# EAGLE board PCB v67 (EAGLE 9.7.0)
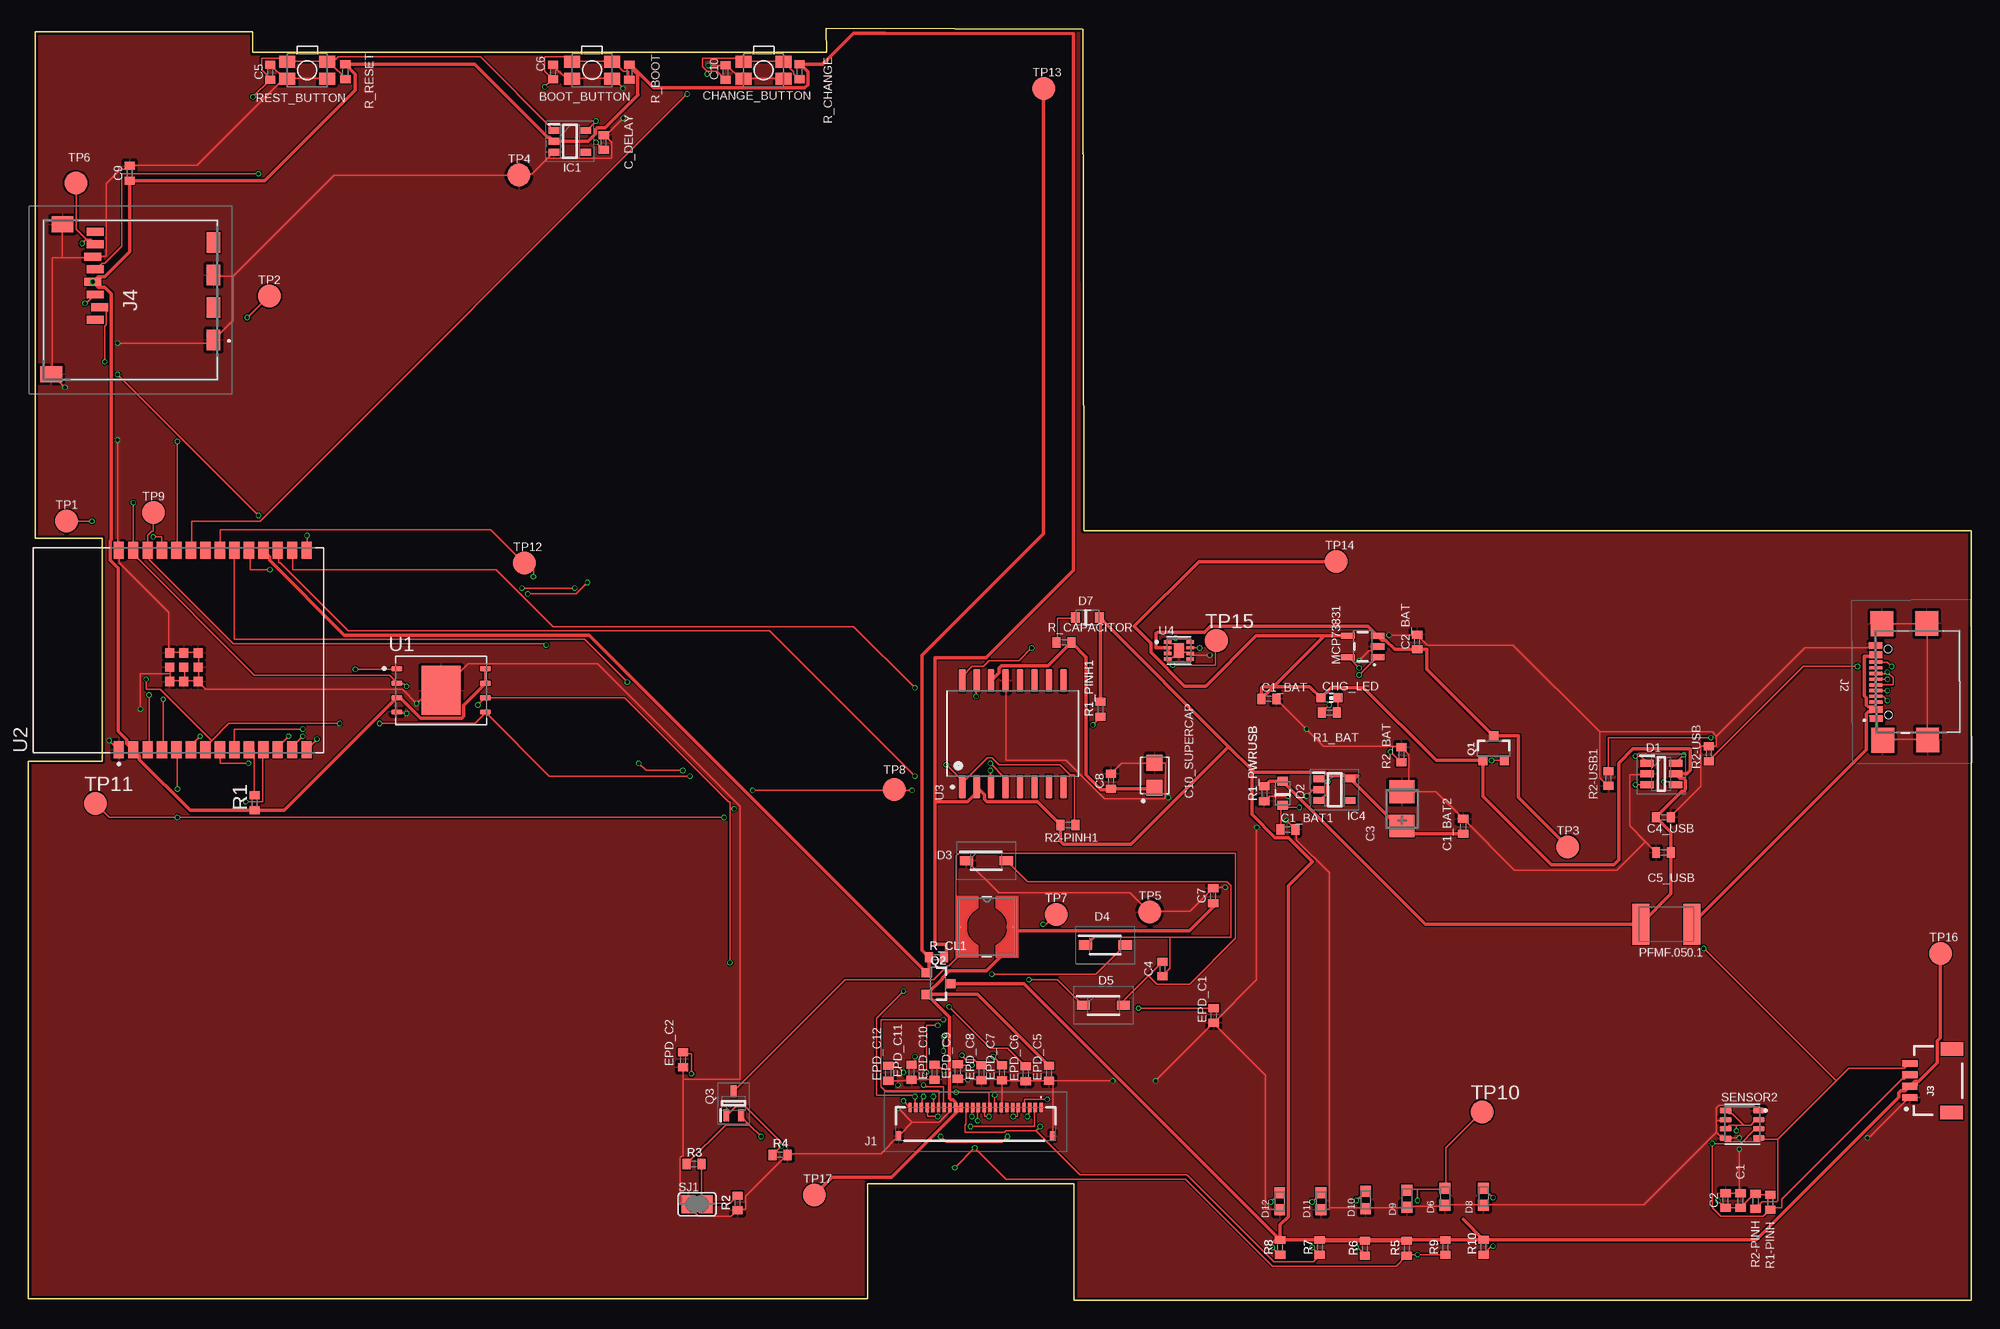
[diagram p0: board, top side]
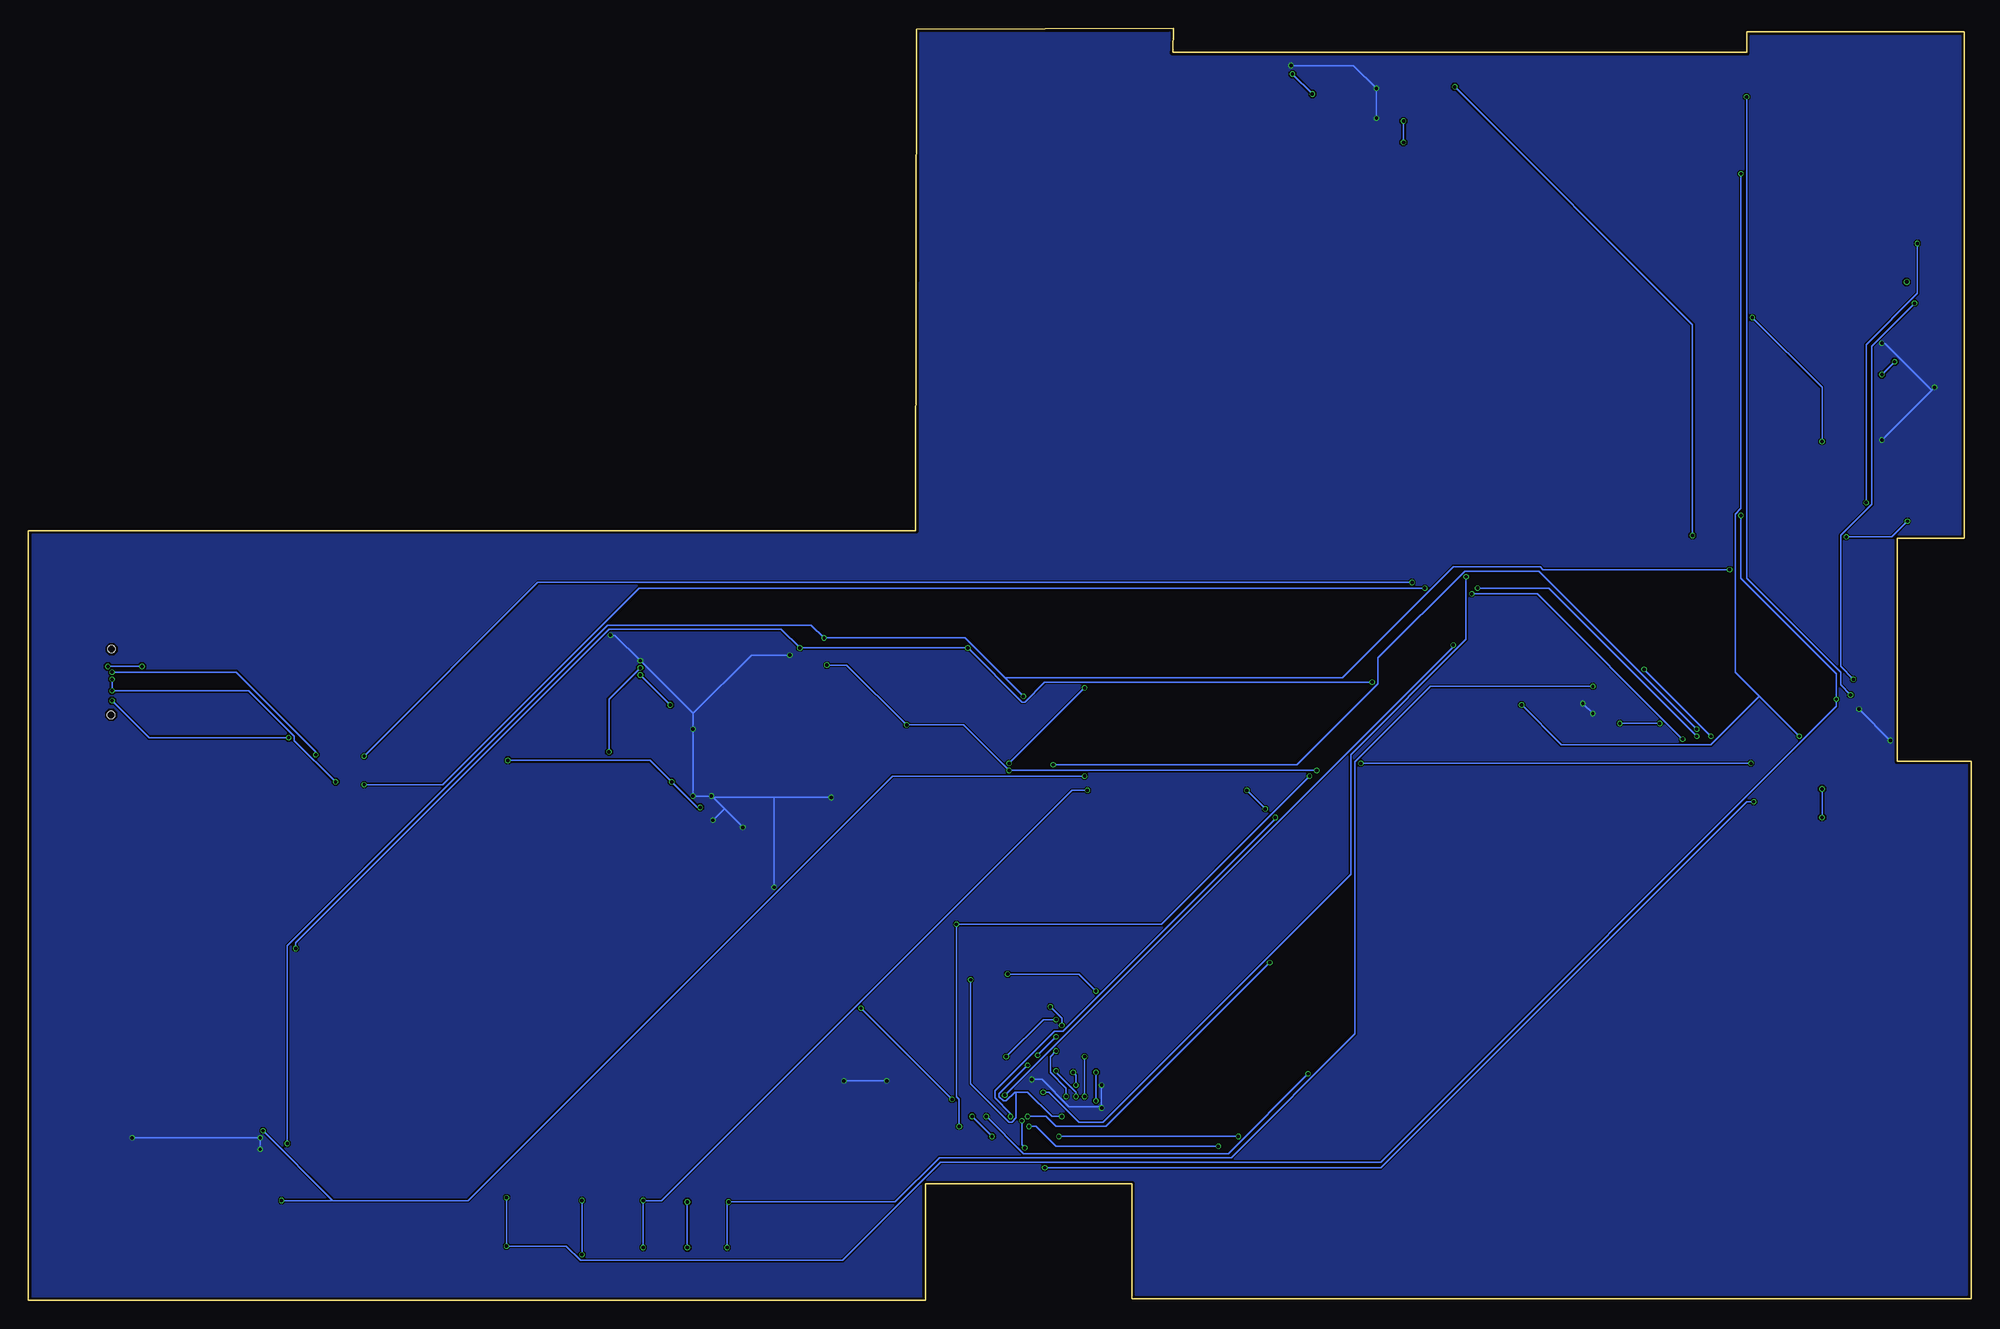
[diagram p1: board, bottom side, seen from below]

Size 170.55 x 111.65 mm. Coordinates in mm from the lower left corner, seen from the top.
Outline: 91.81,0 170.55,0 170.55,67.57 92.66,67.57 92.6,111.59 70.01,111.65 70.08,109.55 19.68,109.55 19.68,111.35 0.6,111.35 0.6,66.89 6.48,66.89 6.48,47.35 0,47.35 0,0.15 73.68,0.15 73.68,10.23 91.81,10.23 91.81,0
Copper layers (1*16): Top / Bottom
Stack-up Default Layer Stack: Top User Defined 0.035mm / Dielectric-1 User Defined 1.6mm / Bottom User Defined 0.035mm
Design rules: minimum copper width classes=1 0.3mm, minimum copper width classes=0 0.15mm, minimum copper width 5mil, minimum drill size 0.3mm, copper clearance wire_polygon to wire_polygon 5mil, copper clearance wire_polygon to pad_smd 5mil, copper clearance wire_polygon to via 5mil, copper clearance pad_smd to pad_smd 5mil, copper clearance pad_smd to via 5mil, copper clearance via to via 5mil, copper clearance smd to pad (same net) 5mil, copper clearance smd to via (same net) 5mil, copper clearance smd to smd (same net) 5mil, dimension clearance 0.2mm, via restrict clearance 0mil, restrict clearance 0mil, drill distance 6mil, keepout clearance 0mil
Net classes: 0 default: width 0.15 mm; 1 POWER: width 0.3 mm

## Footprints (pad centres in the part's own frame; a part is rotated, then mirrored left to right if it is on the bottom)
MYBUTTON = smd 1.4 x 1.05: 1 1.75,0.75; 2 -1.75,0.75; 3 -1.75,-0.75; 4 1.75,-0.75
ESP32_WROVER_EAGLE-LTSPICE_C0402 = smd 0.7 x 0.9: 1 -0.65,0; 2 0.65,0
RCL_CT3528 = smd 2 x 2.2: + -1.5,0; - 1.5,0
CAPCP3225X100N = smd 1.4 x 1.4: 1 -1.1,0; 2 1.1,0
ADAFRUIT_CHIP-LED0603 = smd 0.8 x 0.8: A 0,-0.75; C 0,0.75
SOT95P280X145-6N = smd 1.2 x 0.6: 1 -1.25,0.95; 2 -1.25,0; 3 -1.25,-0.95; 4 1.25,-0.95; 5 1.25,0; 6 1.25,0.95
ESP32_WROVER_AVX---SD0805S020S1R0_AVX_SD0805S020S1R0_0 = smd 0.8 x 0.9: 1 -1.05,0; 2 1.05,0
SOD3716X135N = smd 1.15 x 0.8: 1 -1.75,0; 2 1.75,0
DIOC1608X36N = smd 0.97 x 0.94: 1 -0.75,0; 2 0.75,0
SOT95P280X125-5N = smd 0.9 x 0.6: 1 -1.4,0.95; 2 -1.4,0; 3 -1.4,-0.95; 4 1.4,-0.95; 5 1.4,0.95
SOT95P280X120-5N = smd 0.9 x 0.6: 1 -1.4,0.95; 2 -1.4,0; 3 -1.4,-0.95; 4 1.4,-0.95; 5 1.4,0.95
FH34SRJ24S05SH99 = smd 0.3 x 0.8: 1 5.75,1.45; 2 5.25,1.45; 3 4.75,1.45; 4 4.25,1.45; 5 3.75,1.45; 6 3.25,1.45; 7 2.75,1.45; 8 2.25,1.45; 9 1.75,1.45; 10 1.25,1.45; 11 0.75,1.45; 12 0.25,1.45; 13 -0.25,1.45; 14 -0.75,1.45; 15 -1.25,1.45; 16 -1.75,1.45; 17 -2.25,1.45; 18 -2.75,1.45; 19 -3.25,1.45; 20 -3.75,1.45; 21 -4.25,1.45; 22 -4.75,1.45; 23 -5.25,1.45; 24 -5.75,1.45 | smd 0.4 x 0.8: MP1 6.75,-1.05; MP2 -6.75,-1.05
SAMACSYS_PARTS_USB4110GFA = smd 0.3 x 1.15: A1 -3.35,3.678; A4 -2.55,3.678; A5 -1.25,3.678; A6 -0.25,3.678; A7 0.25,3.678; A8 1.25,3.678; A9 2.55,3.678; A12 3.35,3.678; B1 3.05,3.678; B4 2.25,3.678; B5 1.75,3.678; B6 0.75,3.678; B7 -0.75,3.678; B8 -1.75,3.678; B9 -2.25,3.678; B12 -3.05,3.678 | smd 2.18 x 2: MP1 -5.11,-0.827; MP2 5.11,-0.827; MP3 -5.11,3.103; MP4 5.11,3.103 | hole 0.65: -2.89,2.603; 2.89,2.603
JST04_1MM_RA = smd 0.6 x 1.35: 1 -1.5,0; 2 -0.5,0; 3 0.5,0; 4 1.5,0 | smd 1.2 x 2: NC1 2.8,-3.675; NC2 -2.8,-3.675
112ATAARR03ATTEND = smd 1.8 x 1.2: G1 10.6,10.4; G2 4.9,10.4; S1 7.75,10.4; S2 2.05,10.4 | smd 1.4 x 1.9: G3 13.6,-3.85; G4 0.45,-2.85 | smd 0.7 x 1.5: P1 8.8,0; P2 7.7,0.4; P3 6.6,0; P4 5.5,-0.2; P5 4.4,0; P6 3.3,-0.2; P7 2.2,0; P8 1.1,0
IND_4828-WE-TPC_WRE = smd 0.127 x 0.127: 1 -2.286,0; 2 2.286,0
ESP32_WROVER_SPARKFUN-IC-POWER_SOT23-5 = smd 0.55 x 1.2: 1 -0.95,-1.3; 2 0,-1.3; 3 0.95,-1.3; 4 0.95,1.3; 5 -0.95,1.3
ESP32C6_VARISTOR_CT/CN1812 = smd 1.5 x 3.6: 1 -2.25,0; 2 2.25,0
ESP32_WROVER_SPARKFUN-DISCRETESEMI_SOT23-3 = smd 0.8 x 0.9: 1 -0.95,-1; 2 0.95,-1; 3 0,1.1
SOT65P210X110-3N = smd 1.05 x 0.5: 1 -1.05,0.65; 2 -1.05,-0.65; 3 1.05,0
ESP32_WROVER_EAGLE-LTSPICE_R0402 = smd 0.7 x 0.9: 1 -0.65,0; 2 0.65,0
ESP32_WROVER_BME680_PSON80P300X300X100-8N = smd 1.016 x 0.5: 1 1.458,1.2; 2 1.458,0.4; 3 1.458,-0.4; 4 1.458,-1.2; 5 -1.458,-1.22; 6 -1.458,-0.4; 7 -1.458,0.4; 8 -1.458,1.2
SJ = smd 1.168 x 1.6: 1 -0.762,0; 2 0.762,0
TP20R = smd 2 x 2: TP 0,0
SON127P600X800X80-9N = smd 0.94 x 0.44: 1 -3.895,1.905; 2 -3.895,0.635; 3 -3.895,-0.635; 4 -3.895,-1.905; 5 3.895,-1.905; 6 3.895,-0.635; 7 3.895,0.635; 8 3.895,1.905 | smd 3.4 x 4.3: 9 0,0
XCVR_ESP32-C6-WROOM-1-N8 = smd 1.5 x 0.9: 1 -8.75,5.26; 2 -8.75,3.99; 3 -8.75,2.72; 4 -8.75,1.45; 5 -8.75,0.18; 6 -8.75,-1.09; 7 -8.75,-2.36; 8 -8.75,-3.63; 9 -8.75,-4.9; 10 -8.75,-6.17; 11 -8.75,-7.44; 12 -8.75,-8.71; 13 -8.75,-9.98; 14 -8.75,-11.25; 15 8.75,-11.25; 16 8.75,-9.98; 17 8.75,-8.71; 18 8.75,-7.44; 19 8.75,-6.17; 20 8.75,-4.9; 21 8.75,-3.63; 22 8.75,-2.36; 23 8.75,-1.09; 24 8.75,0.18; 25 8.75,1.45; 26 8.75,2.72; 27 8.75,3.99; 28 8.75,5.26 | smd 0.8 x 0.8: 29_1 -2.755,0.79; 29_2 -1.505,0.79; 29_3 -0.255,0.79; 29_4 -2.755,-0.46; 29_5 -1.505,-0.46; 29_6 -0.255,-0.46; 29_7 -2.755,-1.71; 29_8 -1.505,-1.71; 29_9 -0.255,-1.71
SOIC127P1032X265-16N = smd 2.05 x 0.59: 1 -4.655,4.445; 2 -4.655,3.175; 3 -4.655,1.905; 4 -4.655,0.635; 5 -4.655,-0.635; 6 -4.655,-1.905; 7 -4.655,-3.175; 8 -4.655,-4.445; 9 4.655,-4.445; 10 4.655,-3.175; 11 4.655,-1.905; 12 4.655,-0.635; 13 4.655,0.635; 14 4.655,1.905; 15 4.655,3.175; 16 4.655,4.445
SON50P200X200X80-9N = smd 0.76 x 0.27: 1 -0.985,0.75; 2 -0.985,0.25; 3 -0.985,-0.25; 4 -0.985,-0.75; 5 0.985,-0.75; 6 0.985,-0.25; 7 0.985,0.25; 8 0.985,0.75 | smd 0.9 x 1.3: 9 0,0

## Placement (x,y rotation side)
BOOT_BUTTON  BUTTON_CUSYOMV1  [MYBUTTON]  49.48,108 180 top
C1  100nF  [ESP32_WROVER_EAGLE-LTSPICE_C0402]  150.31,8.78 90 top
C1_BAT  4.7uF  [ESP32_WROVER_EAGLE-LTSPICE_C0402]  108.9,52.8 0 top
C1_BAT1  4.7uF  [ESP32_WROVER_EAGLE-LTSPICE_C0402]  110.57,41.34 0 top
C1_BAT2  4.7uF  [ESP32_WROVER_EAGLE-LTSPICE_C0402]  125.96,41.62 90 top
C2  100nF  [ESP32_WROVER_EAGLE-LTSPICE_C0402]  148.99,8.78 90 top
C2_BAT  4.7uF  [ESP32_WROVER_EAGLE-LTSPICE_C0402]  121.91,57.8 90 top
C3  100uF TANT  [RCL_CT3528]  120.59,43.15 90 top
C4  4.7uF/25V  [ESP32_WROVER_EAGLE-LTSPICE_C0402]  99.55,29.09 90 top
C4_USB  100nF  [ESP32_WROVER_EAGLE-LTSPICE_C0402]  143.54,42.42 0 top
C5  1uF  [ESP32_WROVER_EAGLE-LTSPICE_C0402]  21.23,107.81 90 top
C5_USB  4.7uF  [ESP32_WROVER_EAGLE-LTSPICE_C0402]  143.55,39.32 180 top
C6  100nF  [ESP32_WROVER_EAGLE-LTSPICE_C0402]  46.07,107.83 90 top
C7  10uF  [ESP32_WROVER_EAGLE-LTSPICE_C0402]  104.01,35.52 90 top
C8  100nF  [ESP32_WROVER_EAGLE-LTSPICE_C0402]  95.05,45.58 90 top
C9  100nF  [ESP32_WROVER_EAGLE-LTSPICE_C0402]  8.89,98.94 90 top
C10  100nF  [ESP32_WROVER_EAGLE-LTSPICE_C0402]  61.21,107.78 90 top
C10_SUPERCAP  CPH3225A  [CAPCP3225X100N]  98.87,46.09 90 top
C_DELAY  100nF  [ESP32_WROVER_EAGLE-LTSPICE_C0402]  50.51,101.64 90 top
CHANGE_BUTTON  BUTTON_CUSYOMV1  [MYBUTTON]  64.54,107.98 180 top
CHG_LED  [ADAFRUIT_CHIP-LED0603]  114.22,52.9 270 top
D1  USBLC6-2SC6Y  [SOT95P280X145-6N]  143.36,46.22 0 top
D2  ESP32_WROVER_AVX---SD0805S020S1R0_AVX_SD0805S020S1R0_0_0AVX_SD0805S020S1R0_0_0  [ESP32_WROVER_AVX---SD0805S020S1R0_AVX_SD0805S020S1R0_0]  110.11,44.53 90 top
D3  MBR0530  [SOD3716X135N]  84.1,38.6 0 top
D4  MBR0530  [SOD3716X135N]  94.54,31.2 0 top
D5  MBR0530  [SOD3716X135N]  94.38,25.9 0 top
D6  PGB1010603MR  [DIOC1608X36N]  124.36,9.12 90 top
D7  ESP32_WROVER_AVX---SD0805S020S1R0_AVX_SD0805S020S1R0_0_0AVX_SD0805S020S1R0_0_0  [ESP32_WROVER_AVX---SD0805S020S1R0_AVX_SD0805S020S1R0_0]  92.98,59.95 0 top
D8  PGB1010603MR  [DIOC1608X36N]  127.74,9.12 90 top
D9  PGB1010603MR  [DIOC1608X36N]  121.02,8.92 90 top
D10  PGB1010603MR  [DIOC1608X36N]  117.4,8.82 90 top
D11  PGB1010603MR  [DIOC1608X36N]  113.48,8.72 90 top
D12  PGB1010603MR  [DIOC1608X36N]  109.86,8.72 90 top
EPD_C1  1uF/50v  [ESP32_WROVER_EAGLE-LTSPICE_C0402]  104.06,25.02 90 top
EPD_C2  1uF/50V  [ESP32_WROVER_EAGLE-LTSPICE_C0402]  57.47,21.12 90 top
EPD_C5  0.1uF/50V  [ESP32_WROVER_EAGLE-LTSPICE_C0402]  89.59,19.94 90 top
EPD_C6  1uF/50V  [ESP32_WROVER_EAGLE-LTSPICE_C0402]  87.56,19.9 90 top
EPD_C7  1uF/50V  [ESP32_WROVER_EAGLE-LTSPICE_C0402]  85.47,20 90 top
EPD_C8  1uF/50V  [ESP32_WROVER_EAGLE-LTSPICE_C0402]  83.68,20 90 top
EPD_C9  1uF/50V  [ESP32_WROVER_EAGLE-LTSPICE_C0402]  81.59,20.1 90 top
EPD_C10  1uF/50V  [ESP32_WROVER_EAGLE-LTSPICE_C0402]  79.55,20.04 90 top
EPD_C11  1uF/50V  [ESP32_WROVER_EAGLE-LTSPICE_C0402]  77.53,20.04 90 top
EPD_C12  1uF/50V  [ESP32_WROVER_EAGLE-LTSPICE_C0402]  75.49,19.94 90 top
IC1  BD5229G-TR  [SOT95P280X125-5N]  47.53,101.74 0 top
IC4  XC6220A331MR-G  [SOT95P280X120-5N]  114.67,44.84 0 top
J1  FH34SRJ-24S-0.5SH_99_  [FH34SRJ24S05SH99]  83.15,15.49 0 top
J2  SAMACSYS_PARTS_USB4110-GF-A  [SAMACSYS_PARTS_USB4110GFA]  165.87,54.31 90.4 top
J3  QWIIC_RIGHT_ANGLE  [JST04_1MM_RA]  165.18,19.31 89.6 top
J4  112A-TAAR-R03_ATTEND  [112ATAARR03ATTEND]  5.85,94.9 270 top
L1  68uH  [IND_4828-WE-TPC_WRE]  84.15,32.8 0 top
MCP73831  ESP32_WROVER_SPARKFUN-IC-POWER_MCP73831  [ESP32_WROVER_SPARKFUN-IC-POWER_SOT23-5]  117.14,57.4 90 top
PFMF.050.1  ESP32C6_VARISTORCN1812  [ESP32C6_VARISTOR_CT/CN1812]  143.8,33.03 180 top
Q1  20V/4.2A/52mΩ/1.4W  [ESP32_WROVER_SPARKFUN-DISCRETESEMI_SOT23-3]  128.64,48.41 0 top
Q2  20V/4.2A/52mΩ/1.4W  [ESP32_WROVER_SPARKFUN-DISCRETESEMI_SOT23-3]  79.86,27.81 270 top
Q3  SI1308EDL-T1-GE3  [SOT65P210X110-3N]  61.91,17.3 90 top
R1  10K  [ESP32_WROVER_EAGLE-LTSPICE_R0402]  19.85,43.68 90 top
R1-PINH  10K  [ESP32_WROVER_EAGLE-LTSPICE_R0402]  152.92,8.62 90 top
R1_BAT  200  [ESP32_WROVER_EAGLE-LTSPICE_R0402]  114.22,51.6 0 top
R1_PINH1  1OK  [ESP32_WROVER_EAGLE-LTSPICE_R0402]  94.11,51.89 90 top
R1_PWRUSB  100K  [ESP32_WROVER_EAGLE-LTSPICE_R0402]  108.5,44.49 90 top
R2  2.2  [ESP32_WROVER_EAGLE-LTSPICE_R0402]  62.25,8.56 90 top
R2-PINH  10K  [ESP32_WROVER_EAGLE-LTSPICE_R0402]  151.63,8.72 90 top
R2-PINH1  10K  [ESP32_WROVER_EAGLE-LTSPICE_R0402]  91.27,41.74 180 top
R2-USB  5k1  [ESP32_WROVER_EAGLE-LTSPICE_R0402]  147.54,48 90 top
R2-USB1  5k1  [ESP32_WROVER_EAGLE-LTSPICE_R0402]  138.7,45.82 90 top
R2_BAT  2K  [ESP32_WROVER_EAGLE-LTSPICE_R0402]  120.53,47.9 90 top
R3  0.47  [ESP32_WROVER_EAGLE-LTSPICE_R0402]  58.43,11.98 0 top
R4  10K  [ESP32_WROVER_EAGLE-LTSPICE_R0402]  65.99,12.78 0 top
R5  10K  [ESP32_WROVER_EAGLE-LTSPICE_R0402]  121.01,4.58 90 top
R6  10K  [ESP32_WROVER_EAGLE-LTSPICE_R0402]  117.33,4.58 90 top
R7  10K  [ESP32_WROVER_EAGLE-LTSPICE_R0402]  113.37,4.66 90 top
R8  10K  [ESP32_WROVER_EAGLE-LTSPICE_R0402]  109.89,4.66 90 top
R9  10K  [ESP32_WROVER_EAGLE-LTSPICE_R0402]  124.41,4.66 90 top
R10  10K  [ESP32_WROVER_EAGLE-LTSPICE_R0402]  127.75,4.68 90 top
R_BOOT  1OK  [ESP32_WROVER_EAGLE-LTSPICE_R0402]  52.76,107.82 90 top
R_CAPACITOR  15  [ESP32_WROVER_EAGLE-LTSPICE_R0402]  90.92,57.76 0 top
R_CHANGE  10K  [ESP32_WROVER_EAGLE-LTSPICE_R0402]  67.7,107.84 90 top
R_CL1  10K  [ESP32_WROVER_EAGLE-LTSPICE_R0402]  79.73,30.12 0 top
R_RESET  10K  [ESP32_WROVER_EAGLE-LTSPICE_R0402]  27.83,107.84 90 top
REST_BUTTON  BUTTON_CUSYOMV1  [MYBUTTON]  24.48,107.98 180 top
SENSOR2  BME680  [ESP32_WROVER_BME680_PSON80P300X300X100-8N]  150.46,15.47 0 top
SJ1  [SJ]  58.7,8.44 0 top
TP1  TPTP20R  [TP20R]  3.35,68.42 0 top
TP2  TPTP20R  [TP20R]  21.15,88.16 0 top
TP3  TPTP20R  [TP20R]  135.15,39.82 0 top
TP4  TPTP20R  [TP20R]  43.07,98.78 0 top
TP5  TPTP20R  [TP20R]  98.45,34.1 0 top
TP6  TPTP20R  [TP20R]  4.15,98.1 0 top
TP7  TPTP20R  [TP20R]  90.23,33.9 0 top
TP8  TPTP20R  [TP20R]  76.03,44.86 0 top
TP9  TPTP20R  [TP20R]  10.97,69.16 0 top
TP10  TPTP20R  [TP20R]  127.62,16.56 0 top
TP11  TPTP20R  [TP20R]  5.89,43.64 0 top
TP12  TPTP20R  [TP20R]  43.53,64.72 0 top
TP13  TPTP20R  [TP20R]  89.12,106.38 0 top
TP14  TPTP20R  [TP20R]  114.82,64.86 0 top
TP15  TPTP20R  [TP20R]  104.3,57.92 0 top
TP16  TPTP20R  [TP20R]  167.87,30.46 0 top
TP17  TPTP20R  [TP20R]  69,9.26 0 top
U1  W25Q512JVEIQ  [SON127P600X800X80-9N]  36.23,53.55 0 top
U2  ESP32-C6-WROOM-1-N8  [XCVR_ESP32-C6-WROOM-1-N8]  13.18,57.09 90 top
U3  DS3231SN#  [SOIC127P1032X265-16N]  86.43,49.75 90 top
U4  MAX17048G+T10  [SON50P200X200X80-9N]  101.01,57.05 0 top

## Library data of the parts
BOOT_BUTTON CHANGE_BUTTON CHG_LED PFMF.050.1 REST_BUTTON SJ1 TP1-TP17 = DeskAssistant v19 v1
C1 C1_BAT C1_BAT1 C1_BAT2 C2 C2_BAT C4 C4_USB C5 C5_USB C6-C10 C_DELAY EPD_C1 EPD_C2 EPD_C5-EPD_C12 = DeskAssistant v19 v1; SPICEMODEL: NONE; SPICEPREFIX: C
C3 = DeskAssistant v19 v1; SPICEPREFIX: C
C10_SUPERCAP = DeskAssistant v19 v1; AVAILABILITY: Not in stock; CHECK_PRICES: https://www.snapeda.com/parts/CPH3225A/Seiko+Instruments/view-part/?ref=eda; DESCRIPTION: 11 mF (EDLC) Supercapacitor 3.3 V 1210 (3225 Metric) - -; MF: Seiko Instruments; MP: CPH3225A; PACKAGE: 1210 Seiko; PRICE: None; PURCHASE-URL: https://www.snapeda.com/api/url_track_click_mouser/?unipart_id=562593&manufacturer=Seiko Instruments&part_name=CPH3225A&search_term=None; SNAPEDA_LINK: https://www.snapeda.com/parts/CPH3225A/Seiko+Instruments/view-part/?ref=snap
D1 = DeskAssistant v19 v1; AVAILABILITY: In Stock; CHECK_PRICES: https://www.snapeda.com/parts/USBLC6-2SC6Y/STMicroelectronics/view-part/?ref=eda; DESCRIPTION: 17V Clamp 5A (8/20µs) Ipp Tvs Diode Surface Mount SOT-23-6; MF: STMicroelectronics; MP: USBLC6-2SC6Y; PACKAGE: SOT-23-6 STMicroelectronics; PRICE: None; SNAPEDA_LINK: https://www.snapeda.com/parts/USBLC6-2SC6Y/STMicroelectronics/view-part/?ref=snap
D2 D7 = DeskAssistant v19 v1; CENTROID_NOT_SPECIFIED: No; DATASHEET: http://datasheets.avx.com/schottky.pdf; DIGIKEY_DESCRIPTION: DIODE SCHOTTKY 20V 1A 0805; DIGIKEY_PART_NUMBER: 478-7800-1-ND; LEAD_FREE: yes; MF: AVX; MOUSER_PART_NUMBER: 581-SD0805S020S1R0; PACKAGE: 0805 (2012 metric); PREFIX: D; ROHS: yes; TEMPERATURE_RANGE_HIGH: +125°C; TEMPERATURE_RANGE_LOW: -55°C
D3-D5 = DeskAssistant v19 v1; AVAILABILITY: In Stock; CHECK_PRICES: https://www.snapeda.com/parts/MBR0530/Onsemi/view-part/?ref=eda; DESCRIPTION: Diode Schottky 30 V 500mA Surface Mount SOD-123; MF: ON Semiconductor; MP: MBR0530; PACKAGE: SOD-123-2 ON Semiconductor; PRICE: None; PURCHASE-URL: https://www.snapeda.com/api/url_track_click_mouser/?unipart_id=179458&manufacturer=ON Semiconductor&part_name=MBR0530&search_term=None; SNAPEDA_LINK: https://www.snapeda.com/parts/MBR0530/Onsemi/view-part/?ref=snap
D6 D8-D12 = DeskAssistant v19 v1; AVAILABILITY: In Stock; CHECK_PRICES: https://www.snapeda.com/parts/PGB1010603MR/Littelfuse/view-part/?ref=eda; DESCRIPTION: 150V (Typ) Clamp - Ipp Tvs Diode Surface Mount 0603 (1608 Metric); MF: Littelfuse Inc.; MP: PGB1010603MR; PACKAGE: 0603 Littelfuse Inc.; PRICE: None; PURCHASE-URL: https://www.snapeda.com/api/url_track_click_mouser/?unipart_id=5659453&manufacturer=Littelfuse Inc.&part_name=PGB1010603MR&search_term=None; SNAPEDA_LINK: https://www.snapeda.com/parts/PGB1010603MR/Littelfuse/view-part/?ref=snap
IC1 = DeskAssistant v19 v1; DESCRIPTION: Voltage Detector with Adjustable Delay Time: CMOS processes are utilized to develop high precision, low current consumption CMOS reset ICs that allow arbitrary setting of the delay time. The extensive lineup includes both Nch Open Drain and CMOS output types in a wide range of detection voltages (from 2.3V to 6.0V, in 0.1V steps), enabling selection of the ideal solution based on customer requirements. In addition, the entire series is of course both lead-free and RoHS-compliant.; HEIGHT: 1.25mm; MANUFACTURER_NAME: ROHM Semiconductor; MANUFACTURER_PART_NUMBER: BD5229G-TR; MOUSER_PART_NUMBER: 755-BD5229G-TR; MOUSER_PRICE-STOCK: https://www.mouser.co.uk/ProductDetail/ROHM-Semiconductor/BD5229G-TR?qs=4kLU8WoGk0vvnhrrYwdszw%3D%3D
IC4 = DeskAssistant v19 v1; DESCRIPTION: LDO Voltage Regulators; HEIGHT: 1.2mm; MANUFACTURER_NAME: Torex; MANUFACTURER_PART_NUMBER: XC6220A331MR-G; MOUSER_PART_NUMBER: 865-XC6220A331MR-G; MOUSER_PRICE-STOCK: https://www.mouser.co.uk/ProductDetail/Torex-Semiconductor/XC6220A331MR-G?qs=AsjdqWjXhJ8ZSWznL1J0gg%3D%3D
J1 = DeskAssistant v19 v1; DESCRIPTION: 24 Position FFC, FPC Connector Contacts, Top and Bottom 0.020" (0.50mm) Surface Mount, Right Angle; HEIGHT: 1.1mm; MANUFACTURER_NAME: Hirose; MANUFACTURER_PART_NUMBER: FH34SRJ-24S-0.5SH(99); MOUSER_PART_NUMBER: 798-FH34SRJ24S05SH99; MOUSER_PRICE-STOCK: https://www.mouser.co.uk/ProductDetail/Hirose-Connector/FH34SRJ-24S-0.5SH99?qs=vcbW%252B4%252BSTIpKBl5ap9J8Fw%3D%3D
J2 = DeskAssistant v19 v1; DESCRIPTION: CONN USB 2.0 TYPE-C R/A SMT; HEIGHT: 3.26mm; MANUFACTURER_NAME: GCT (GLOBAL CONNECTOR TECHNOLOGY); MANUFACTURER_PART_NUMBER: USB4110-GF-A; MOUSER_PART_NUMBER: 640-USB4110-GF-A; MOUSER_PRICE-STOCK: https://www.mouser.co.uk/ProductDetail/GCT/USB4110-GF-A?qs=KUoIvG%2F9IlYiZvIXQjyJeA%3D%3D
J3 = DeskAssistant v19 v1; PROD_ID: CONN-13694
J4 = DeskAssistant v19 v1; DESCRIPTION: Micro SD Card Socket, Push-Push Type, Top Mount, SMT, H=1.83mm, 10u; HEIGHT: 1.9mm; MANUFACTURER_NAME: ATTEND; MANUFACTURER_PART_NUMBER: 112A-TAAR-R03 ATTEND
L1 = DeskAssistant v19 v1; COPYRIGHT: Copyright (C) 2024 Ultra Librarian. All rights reserved.; MANUFACTURER_PART_NUMBER: 744043680; MFR_NAME: Wurth Electronics
MCP73831 = DeskAssistant v19 v1; PROD_ID: IC-09995
Q1 Q2 = DeskAssistant v19 v1; PROD_ID: TRAN-14388
Q3 = DeskAssistant v19 v1; AVAILABILITY: In Stock; CHECK_PRICES: https://www.snapeda.com/parts/SI1308EDL-T1-GE3/Vishay+Siliconix/view-part/?ref=eda; DESCRIPTION: Si1308EDL-T1-GE3 N-channel MOSFET Transistor, 1.5 A, 30 V, 3-Pin SC-70 | Siliconix / Vishay SI1308EDL-T1-GE3; MF: Vishay Siliconix; MP: SI1308EDL-T1-GE3; PACKAGE: SOT-323 Vishay Semiconductor; PRICE: None; PURCHASE-URL: https://www.snapeda.com/api/url_track_click_mouser/?unipart_id=274603&manufacturer=Vishay Siliconix&part_name=SI1308EDL-T1-GE3&search_term=None; SNAPEDA_LINK: https://www.snapeda.com/parts/SI1308EDL-T1-GE3/Vishay+Siliconix/view-part/?ref=snap
R1 R1-PINH R1_BAT R1_PINH1 R1_PWRUSB R2 R2-PINH R2-PINH1 R2-USB R2-USB1 R2_BAT R3-R10 R_BOOT R_CAPACITOR R_CHANGE R_CL1 R_RESET = DeskAssistant v19 v1; SPICEMODEL: NONE; SPICEPREFIX: R
SENSOR2 = DeskAssistant v19 v1; AVAILABILITY: Unavailable; DESCRIPTION: Integrated Environmental Unit; MF: Bosch Sensortec; MP: BME680; PACKAGE: LGA-8 Bosch Tools; PRICE: None
U1 = DeskAssistant v19 v1; AVAILABILITY: In Stock; CHECK_PRICES: https://www.snapeda.com/parts/W25Q512JVEIQ/Winbond+Electronics/view-part/?ref=eda; DESCRIPTION: FLASH - NOR Memory IC 512Mb (64M x 8) SPI - Quad I/O 133 MHz 8-WSON (8x6); MF: Winbond Electronics; MP: W25Q512JVEIQ; PACKAGE: Package; PRICE: None; SNAPEDA_LINK: https://www.snapeda.com/parts/W25Q512JVEIQ/Winbond+Electronics/view-part/?ref=snap
U2 = DeskAssistant v19 v1; AVAILABILITY: In Stock; CHECK_PRICES: https://www.snapeda.com/parts/ESP32-C6-WROOM-1-N8/Espressif+Systems/view-part/?ref=eda; DESCRIPTION: Multiprotocol Modules ESP32-C6 module, Wi-Fi 6 in 2.4 GHz band, Bluetooth 5, Zigbee 3.0 and Thread. ESP34-WROOM Compatible - ENGINEERING SAMPLE; MF: Espressif Systems; MP: ESP32-C6-WROOM-1-N8; PACKAGE: None; PRICE: None; SNAPEDA_LINK: https://www.snapeda.com/parts/ESP32-C6-WROOM-1-N8/Espressif+Systems/view-part/?ref=snap
U3 = DeskAssistant v19 v1; AVAILABILITY: In Stock; CHECK_PRICES: https://www.snapeda.com/parts/DS3231SN%23/Analog+Devices/view-part/?ref=eda; DESCRIPTION: Extremely Accurate I²C-Integrated RTC/TCXO/Crystal; MF: Analog Devices; MP: DS3231SN#; PACKAGE: SOIC-16 Maxim; PRICE: None; PURCHASE-URL: https://www.snapeda.com/api/url_track_click_mouser/?unipart_id=99048&manufacturer=Analog Devices&part_name=DS3231SN#&search_term=None; SNAPEDA_LINK: https://www.snapeda.com/parts/DS3231SN%23/Analog+Devices/view-part/?ref=snap
U4 = DeskAssistant v19 v1; AVAILABILITY: In Stock; CHECK_PRICES: https://www.snapeda.com/parts/MAX17048G+T10/Analog+Devices/view-part/?ref=eda; DESCRIPTION: 3µA 1-Cell/2-Cell Fuel Gauge with ModelGauge; MF: Analog Devices; MP: MAX17048G+T10; PACKAGE: TDFN-8 Maxim; PRICE: None; PURCHASE-URL: https://www.snapeda.com/api/url_track_click_mouser/?unipart_id=329239&manufacturer=Analog Devices&part_name=MAX17048G+T10&search_term=None; SNAPEDA_LINK: https://www.snapeda.com/parts/MAX17048G+T10/Analog+Devices/view-part/?ref=snap

## Nets
3V3 [POWER]: C1_BAT2.1 C3.+ C9.1 D7.2 IC1.2 IC4.5 J3.2 J4.P4 Q2.3 R1.1 R1_PINH1.2 R2-PINH1.2 R5.2 R6.2 R7.2 R8.2 R9.2 R10.2 R_BOOT.2 R_CHANGE.2 R_CL1.2 R_RESET.2 TP16.TP U1.3 U1.7 U1.8 U2.2 U3.2
32KHZ: R2-PINH1.1 U2.9 U3.1
DN: D1.4 J2.A7 J2.B7
DP: D1.6 J2.A6 J2.B6
EPD_3V3 [POWER]: C7.1 EPD_C5.2 J1.15 J1.16 L1.2 Q2.2 TP17.TP
EPD_3V3_C [POWER]: Q2.1 R_CL1.1 TP13.TP U2.18
EPD_BUSY: J1.9 TP9.TP U2.26
EPD_CS: D6.2 D9.2 J1.12 R5.1 R9.1 TP10.TP U2.11
EPD_DC: J1.11 TP11.TP U2.5
EPD_RST: J1.10 TP12.TP U2.21
FLASH_CS: U1.1 U2.12
GDR: J1.2 Q3.1 R4.1
GND: BOOT_BUTTON.1 BOOT_BUTTON.2 C1.2 C1_BAT1.2 C1_BAT2.2 C1_BAT.2 C2.2 C2_BAT.2 C3.- C4_USB.2 C5.2 C5_USB.2 C6.2 C7.2 C8.2 C9.2 C10.2 C10_SUPERCAP.2 C_DELAY.2 CHANGE_BUTTON.1 CHANGE_BUTTON.2 D1.2 D3.1 D6.1 D8.1 D9.1 D10.1 D11.1 D12.1 EPD_C1.1 EPD_C2.1 EPD_C5.1 EPD_C6.1 EPD_C7.1 EPD_C8.1 EPD_C9.1 EPD_C10.1 EPD_C11.1 EPD_C12.1 IC1.3 IC4.2 J1.8 J1.17 J1.MP1 J1.MP2 J2.A1 J2.A12 J2.B1 J2.B12 J2.MP1 J2.MP2 J2.MP3 J2.MP4 J3.1 J4.G1 J4.G2 J4.G3 J4.G4 J4.P6 MCP73831.2 R1_PWRUSB.1 R2-USB1.1 R2-USB.2 R2.1 R2_BAT.2 R4.2 REST_BUTTON.1 REST_BUTTON.2 SENSOR2.1 SENSOR2.5 SENSOR2.7 SJ1.1 TP4.TP TP5.TP U1.4 U1.9 U2.1 U2.28 U2.29_1 U2.29_2 U2.29_3 U2.29_4 U2.29_5 U2.29_6 U2.29_7 U2.29_8 U2.29_9 U3.13 U4.1 U4.4 U4.6 U4.9
GPIO8: R1.2 U2.10
I2C_PW: C1.1 C2.1 R1-PINH.2 R2-PINH.2 SENSOR2.2 SENSOR2.6 SENSOR2.8 U2.17
INT_RTC: R1_PINH1.1 TP15.TP U2.8 U3.3
IO/BOOT: BOOT_BUTTON.3 BOOT_BUTTON.4 C6.1 R_BOOT.1 U2.15
IO/CHANGE: C10.1 CHANGE_BUTTON.3 CHANGE_BUTTON.4 R_CHANGE.1 U2.23
MISO: D12.2 J4.P7 R8.1 TP6.TP U1.2 U2.27
MOSI: D11.2 J1.14 J4.P3 R7.1 TP7.TP U1.5 U2.7
N$2: J2.B5 R2-USB.1
N$4: C1_BAT1.1 D2.1 IC4.1 IC4.3 Q1.2
N$5: C4.1 D3.2 D4.1
N$6: MCP73831.5 R2_BAT.1
N$7: CHG_LED.C R1_BAT.2
N$8: MCP73831.1 R1_BAT.1
N$9: J2.A5 R2-USB1.2
N$11: EPD_C12.2 J1.24
N$12: EPD_C10.2 J1.22
N$13: EPD_C8.2 J1.20
N$14: EPD_C7.2 J1.19
N$15: EPD_C6.2 J1.18
N$16: EPD_C2.2 J1.5
N$17: EPD_C1.2 J1.4
N$18: C_DELAY.1 IC1.5
N$19: D7.1 R_CAPACITOR.1
PREVGH: D5.1 EPD_C9.2 J1.21
PREVGL: D4.2 EPD_C11.2 J1.23
RESE: J1.3 Q3.2 R3.1
RESE': R2.2 R3.2 SJ1.2
RESET: C5.1 IC1.1 R_RESET.1 REST_BUTTON.3 REST_BUTTON.4 U2.3
RTC_RST: U2.16 U3.4
RX: TP2.TP U2.24
SCK: D10.2 J1.13 J4.P5 R6.1 TP8.TP U1.6 U2.6
SCL: J3.4 R2-PINH.1 SENSOR2.4 U2.20 U3.16 U4.7
SDA: J3.3 R1-PINH.1 SENSOR2.3 U2.19 U3.15 U4.8
SRC: C4.2 D5.2 L1.1 Q3.3
SS_SD: D8.2 J4.P2 R10.1 U2.4
TX: TP1.TP U2.25
USB_D+: D1.1 U2.14
USB_D-: D1.3 U2.13
VBAT [POWER]: C2_BAT.1 MCP73831.3 Q1.3 TP3.TP U4.2 U4.3
VBUS [POWER]: C1_BAT.1 C4_USB.1 C5_USB.1 CHG_LED.A D1.5 D2.2 MCP73831.4 PFMF.050.1.2 Q1.1 R1_PWRUSB.2 TP14.TP
VRTC [POWER]: C8.1 C10_SUPERCAP.1 R_CAPACITOR.2 U3.14
VUSB [POWER]: J2.A4 J2.A9 J2.B4 J2.B9 PFMF.050.1.1

## Tracks (layer width: path | path; a pad name or v marks a point on that pad's centre or on a via)
3V3  (via drill 0.35)
  Top 0.3: U1.8 U1.7 38.21,52.27 38.21,51.28 38.05,51.12 34.41,51.12 32.62,52.91 U1.3 22.45,43.03 R1.1 14.18,43.03 9.73,47.48 9.73,47.8 U2.2 8.65,48.88 8.65,49.2 7.9,49.95 7.9,64.27 7.19,64.98 7.19,66.71 7.28,66.79 7.28,88.37 6.71,88.93 6.12,88.93 J4.P4 6.12,89.87 6.71,89.87 8.89,92.05 C9.1 20.74,98.29 28.7,106.25 28.7,107.62 R_RESET.2 39.19,108.49 45.56,102.11 45.76,102.11 IC1.2 49.12,101.74 49.78,102.4 49.78,102.76 49.95,102.92 50.63,102.92 53.54,105.83 53.49,105.88 53.49,107.64 52.76,108.36 R_BOOT.2 52.86,108.47 54.9,106.43 68.13,106.43 68.43,106.73 68.43,107.86 67.8,108.49 R_CHANGE.2 69.7,108.49 72.42,111.21 75.2,111.21 91.74,111.17 91.74,64.09 84.08,56.43 79.58,56.43 79.58,43.77 | R1_PINH1.2 94.11,59.87 D7.2 105.36,48.62 | 105.36,48.62 107.41,46.57 | 107.41,46.57 107.61,46.37 113.83,46.37 114.13,46.07 116.7,46.07 116.42,45.79 IC4.5 | IC4.5 119.63,42.23 120.42,42.23 120.59,42.06 C3.+ 121.27,40.97 C1_BAT2.1 | 125.96,7.12 R10.2 124.43,5.33 R9.2 121.09,5.31 R5.2 R6.2 113.45,5.23 R7.2 R8.2 | R8.2 109.48,5.31 109.34,5.17 109.75,5.17 R8.2 | R8.2 151.68,5.31 164.22,17.85 164.22,18.23 164.38,18.39 164.76,18.39 J3.2 165.59,19.23 165.97,19.23 167.59,20.85 167.59,22.8 167.87,23.07 TP16.TP | R8.2 87.39,27.81 Q2.3 | R8.2 109.89,6.65 110.61,7.37 110.61,36.42 112.71,38.52 110.62,40.61 109.45,40.61 107.41,42.66 107.41,46.57 | 117.28,44.58 IC4.5 | 79.58,43.77 79.58,31.27 80.58,31.27 80.58,30.32 R_CL1.2 | 105.36,48.62 96.8,40.05 90.88,40.05 90.54,40.39 90.62,40.47 R2-PINH1.2 88.57,43.79 84.16,43.79 83.95,44 83.95,44.4 U3.2 83.45,44.77 82.45,43.77 79.58,43.77
  other vias: 5.65,89.4
32KHZ  (via drill 0.3)
  Top 0.15: 82.08,45.52 84.2,47.65 84.58,47.65 85.2,47.02 90.58,47.02 91.45,46.15 91.83,46.15 91.83,41.77 R2-PINH1.1 | 82.08,45.52 82.08,45.15 U3.1 82.08,45.52 | U2.9 18.08,50.15 v24.08,50.15 | 82.08,45.52 v80.58,47.02
  Bottom 0.15: v24.08,50.15 37.95,64.03 44.45,64.03 52.08,56.4 52.08,54.15 59.2,47.02 v80.58,47.02
DN  (via drill 0.3)
  Top 0.15: v163.21,53.52 J2.B7 | v163.21,54.52 162.21,54.52 J2.A7 | v143.58,45.52 144.33,45.52 144.58,45.27 D1.4
  Bottom 0.15: v163.21,54.52 v163.21,53.52 151.21,53.52 147.21,49.52 147.21,49.15 v143.58,45.52
DP  (via drill 0.3)
  Top 0.15: 163.21,55.02 163.33,55.02 163.71,54.65 163.71,54.02 162.21,54.02 J2.A6 | 163.21,55.02 162.21,55.02 J2.B6 | v145.33,47.9 144.71,47.27 D1.6 | 163.21,55.02 v163.21,55.15
  Bottom 0.15: v145.33,47.9 145.33,48.15 152.33,55.15 v163.21,55.15
EPD_3V3
  Top 0.3: Q2.2 80.23,28.23 80.23,28.32 80.84,28.93 84.12,28.93 86.44,31.25 86.44,32.45 | 86.44,32.45 L1.2 | 86.44,32.45 101.94,32.45 104.01,34.52 C7.1 | Q2.2 80.86,24.86 80.86,17.77 81.01,17.62 81.16,17.62 81.33,17.45 81.33,17.01 J1.16 J1.15 75.77,10.81 70.55,10.81 TP17.TP | EPD_C5.2 83.32,26.86 Q2.2
EPD_3V3_C
  Top 0.3: TP13.TP 89.12,67.31 78.44,56.63 78.44,30.76 R_CL1.1 79.08,28.98 Q2.1 49.21,58.41 27.73,58.41 21.16,64.98 21.16,65.3 U2.18
EPD_BUSY  (via drill 0.3)
  Top 0.15: v84.83,18.02 84.83,17.02 J1.9 | v45.45,57.52 45.33,57.65 17.95,57.65 10.58,65.03 10.58,65.78 U2.26 10.46,65.9 10.46,67.15 10.83,67.53 10.96,67.53 10.96,69.15 TP9.TP
  Bottom 0.15: v84.83,18.02 45.45,57.4 v45.45,57.52
EPD_CS  (via drill 0.3)
  Top 0.15: 121.95,9.78 124.33,9.78 D6.2 124.45,9.9 124.45,13.4 127.58,16.52 TP10.TP | 121.95,9.78 121.08,9.78 D9.2 | v83.33,15.78 83.33,16.9 J1.12 | R9.1 124.33,4.03 v121.95,4.03 121.08,4.03 R5.1 120.95,3.9 120.08,3.02 109.2,3.02 101.58,10.65 85.83,10.65 v83.08,13.4 v81.33,11.65 | v19.08,43.77 20.58,43.77 20.58,48.27 U2.11 | v121.95,8.78 121.95,9.78
  Bottom 0.15: v83.33,15.78 83.33,13.65 v83.08,13.4 | v19.08,43.77 19.7,43.77 51.83,11.65 v81.33,11.65 | v121.95,4.03 v121.95,8.78
EPD_DC  (via drill 0.3)
  Top 0.15: v84.33,16.15 83.95,16.15 83.95,16.9 J1.11 | v61.08,42.4 v13.08,42.4 7.08,42.4 5.96,43.52 TP11.TP | v13.08,44.9 13.08,48.27 U2.5
  Bottom 0.15: v84.33,16.15 84.33,16.4 85.7,17.77 85.7,18.4 80.45,23.65 79.7,23.65 61.08,42.27 v61.08,42.4 | v13.08,42.4 v13.08,44.9
EPD_RST  (via drill 0.3)
  Top 0.15: v81.45,18.27 84.33,18.27 84.33,17.02 J1.10 | v44.33,63.52 44.33,64.65 43.58,64.65 TP12.TP 43.45,64.78 40.58,67.65 16.83,67.65 16.83,65.9 U2.21
  Bottom 0.15: v81.45,18.27 80.95,18.27 78.33,15.65 76.2,15.65 54.45,37.4 54.45,47.9 44.33,58.02 v44.33,63.52
FLASH_CS  (via drill 0.3)
  Top 0.15: v28.7,55.4 32.33,55.4 U1.1 | v22.83,49.52 21.95,48.65 21.95,48.4 U2.12
  Bottom 0.15: v22.83,49.52 v28.7,55.4
GDR  (via drill 0.3)
  Top 0.15: v82.7,15.28 88.33,15.28 88.33,16.9 J1.2 | R4.1 65.45,12.9 v66.08,13.53 66.08,13.9 62.95,17.02 62.08,17.02 61.33,16.27 Q3.1
  Bottom 0.15: v82.7,15.28 82.08,15.28 80.33,13.53 v66.08,13.53
GND  (via drill 0.3)
  Top 0.15: CHANGE_BUTTON.2 66.2,107.28 62.83,107.28 CHANGE_BUTTON.1 62.7,107.28 62.45,107.28 61.33,108.4 C10.2 61.2,108.4 v59.7,108.4 | C6.2 46.08,108.4 47.2,107.28 47.7,107.28 BOOT_BUTTON.1 47.83,107.28 51.2,107.28 BOOT_BUTTON.2 51.33,107.15 51.45,107.15 v52.2,106.4 | 17.95,89.9 17.95,86.03 16.33,84.4 J4.G1 16.2,84.28 15.96,84.03 v7.83,84.03 | 17.95,89.9 16.33,89.9 J4.G2 | 45.58,100.28 44.2,98.9 43.08,98.9 TP4.TP 42.95,98.78 26.83,98.78 17.95,89.9 | 45.58,100.28 46.08,100.78 IC1.3 | 45.58,100.28 51.2,100.28 51.2,101.65 50.58,102.28 C_DELAY.2 50.58,102.4 50.83,102.4 v52.2,103.78 | v33.2,51.52 32.45,51.52 U1.4 | U2.29_7 14.96,54.4 14.96,55.52 U2.29_8 14.96,55.65 14.96,56.77 U2.29_9 14.83,56.9 13.71,56.9 U2.29_6 13.58,56.9 12.46,56.9 U2.29_3 12.33,56.9 12.33,60.4 7.96,64.78 7.96,65.78 U2.28 7.83,65.9 v7.83,75.53 | 12.46,55.02 12.46,55.52 U2.29_2 | 12.46,55.02 12.46,54.4 | 13.71,54.4 13.71,55.52 U2.29_5 | 12.46,54.4 13.58,54.4 U2.29_4 13.71,54.4 | 12.46,54.4 U2.29_1 | 13.71,54.4 14.83,54.4 U2.29_7 | v7.08,49.15 7.83,48.4 U2.1 | v9.83,51.9 9.83,55.02 12.46,55.02 | U2.29_7 14.96,54.27 15.58,53.65 32.83,53.65 v34.08,52.4 35.2,53.52 36.2,53.52 U1.9 38.58,55.9 49.95,55.9 62.45,43.4 62.45,19.4 57.45,19.4 | 22.45,107.28 21.33,108.4 C5.2 | 22.45,107.28 22.7,107.28 REST_BUTTON.1 | REST_BUTTON.2 26.2,107.28 22.83,107.28 REST_BUTTON.1 | 2.96,91.53 5.58,91.53 J4.P6 5.71,91.65 6.83,91.65 6.83,98.03 8.08,99.28 8.58,99.28 8.83,99.53 C9.2 8.96,99.65 14.83,99.65 22.45,107.28 | 2.96,91.53 2.08,91.53 2.08,81.4 J4.G3 2.08,81.28 v3.21,80.15 | 2.96,91.53 2.96,94.4 J4.G4 | 22.45,107.28 REST_BUTTON.1
  Top 0.15: C2.2 149.08,9.4 150.21,9.4 C1.2 150.21,9.53 v150.21,13.28 | 148.21,14.78 148.46,14.53 148.71,14.53 148.96,14.28 SENSOR2.5 149.08,14.28 v150.21,14.28 | 148.21,15.78 148.21,14.78 | 148.21,15.78 148.96,15.78 SENSOR2.7 | 148.21,15.78 148.21,16.9 148.46,17.15 151.46,17.15 151.83,16.77 SENSOR2.1 | v161.46,14.28 161.58,14.28 165.08,17.77 J3.1 | 114.2,8.15 114.2,8.03 113.58,8.03 D11.1 | 114.2,8.15 114.2,37.52 111.33,40.4 111.33,41.27 C1_BAT1.2 111.2,41.4 v110.45,42.15 | 114.2,8.15 117.33,8.15 D10.1 117.45,8.15 120.95,8.15 D9.1 121.08,8.28 124.33,8.28 D6.1 124.45,8.4 127.7,8.4 D8.1 127.83,8.4 141.83,8.4 148.21,14.78 | J2.B12 162.21,51.15 162.21,51.02 J2.A1 162.33,50.9 162.33,49.27 162.71,49.27 J2.MP3 162.83,49.27 166.71,49.27 | 166.71,49.27 166.71,59.4 J2.MP2 166.58,59.4 162.83,59.4 J2.MP4 162.71,59.27 162.21,59.27 162.21,57.65 J2.A12 162.21,57.52 162.21,57.4 J2.B1 162.08,57.27 155.96,57.27 148.21,49.52 | 166.71,49.27 J2.MP1 | 137.96,49.9 137.96,45.9 138.58,45.27 R2-USB1.1 | 137.96,49.9 147.83,49.9 148.21,49.52 | 148.21,49.52 148.21,48.65 R2-USB.2 146.83,48.65 146.83,45.15 144.21,42.52 C4_USB.2 | 137.96,49.9 130.33,57.52 122.83,57.52 121.95,58.4 C2_BAT.2 121.83,58.4 v119.45,58.4 | 141.96,40.27 140.58,41.65 140.58,46.15 142.08,46.15 D1.2 | 141.96,40.27 142.83,39.4 C5_USB.2 | 121.2,44.65 121.2,47.9 120.58,48.52 R2_BAT.2 120.45,48.65 113.7,48.65 v112.2,50.15 109.58,52.77 C1_BAT.2 | 121.2,44.65 C3.- 120.7,44.65 | 121.2,44.65 123.58,44.65 C1_BAT2.2 130.46,37.77 139.46,37.77 141.96,40.27 | 89.95,19.27 89.95,14.53 J1.MP1 | 89.95,19.27 89.7,19.27 EPD_C5.1 | J1.8 85.45,17.02 85.45,19.27 EPD_C7.1
  Top 0.15: EPD_C7.1 85.58,19.27 87.45,19.27 EPD_C6.1 87.58,19.27 89.58,19.27 EPD_C5.1 | EPD_C7.1 85.45,19.4 83.7,19.4 EPD_C8.1 83.58,19.4 v82.45,19.4 81.7,19.4 EPD_C9.1 | 76.33,19.27 77.45,19.27 EPD_C11.1 77.58,19.4 79.45,19.4 EPD_C10.1 | 76.33,19.27 75.58,19.27 EPD_C12.1 | 77.58,15.65 76.45,14.53 J1.MP2 76.33,14.4 74.83,12.9 66.7,12.9 R4.2 66.58,12.78 62.95,9.15 62.95,8.03 62.33,8.03 R2.1 62.2,7.9 61.7,7.4 58.83,7.4 57.83,8.4 SJ1.1 57.83,8.53 57.2,8.53 57.2,12.53 57.33,12.65 57.45,12.65 57.45,19.4 | 77.58,15.65 79.95,15.65 80.83,16.52 80.83,16.9 J1.17 | v76.33,18.9 76.33,19.27 | 77.58,15.65 v76.33,16.9 | 57.45,19.4 57.45,20.4 EPD_C2.1 | D3.1 82.45,38.52 85.2,35.77 96.7,35.77 98.33,34.15 TP5.TP 98.45,34.15 101.95,34.15 103.95,36.15 C7.2 104.08,36.27 v105.08,36.27 | C8.2 95.08,46.27 95.95,47.15 98.83,47.15 C10_SUPERCAP.2 98.95,47.15 99.83,47.15 99.83,44.15 | 99.83,44.15 99.7,44.02 94.45,44.02 91.08,47.4 85.83,47.4 85.83,54.4 U3.13 | EPD_C1.1 104.08,24.27 108.58,19.77 108.58,8.03 109.83,8.03 D12.1 | 100.95,56.9 101.08,57.02 U4.9 | 100.95,56.9 100.45,56.4 100.08,56.4 U4.4 | U4.1 100.08,57.77 100.2,57.65 100.58,57.65 101.08,57.15 U4.9 | 100.95,56.9 101.95,56.9 U4.6 102.08,56.77 102.2,56.65 v103.7,56.65 | 100.95,56.9 U4.9 | v110.58,44.27 108.95,44.27 108.58,43.9 R1_PWRUSB.1 | v112.2,44.27 112.7,44.77 113.2,44.77 IC4.2 | v116.83,56.15 117.7,57.02 117.95,57.02 118.33,57.4 MCP73831.2 | v107.83,41.52 107.83,28.15 104.08,24.4 EPD_C1.1 | v100.08,44.15 99.83,44.15 | v95.2,19.27 89.95,19.27 | v98.95,19.27 103.95,24.27 EPD_C1.1 | 89.95,19.27 EPD_C5.1
  Bottom 0.15: v59.7,108.4 54.2,108.4 v52.2,106.4 v52.2,103.78 | v34.08,52.4 v33.2,51.52 | v9.83,51.9 v7.08,49.15 | v3.21,80.15 3.46,79.9 | 3.46,79.9 v7.83,75.53 | v7.83,84.03 7.58,84.03 3.46,79.9 | v150.21,13.28 v150.21,14.28 v161.46,14.28 | 76.33,17.02 v76.33,18.9 | v82.45,19.4 81.58,19.4 79.2,17.02 76.33,17.02 | 76.33,17.02 v76.33,16.9 | 112.2,51.52 v116.83,56.15 119.08,58.4 v119.45,58.4 | 112.2,51.52 v112.2,50.15 v112.2,44.27 v110.58,44.27 110.45,44.15 | v103.7,56.65 107.08,56.65 112.2,51.52 | 110.45,44.15 109.45,43.15 | 109.45,43.15 v107.83,41.52 | 110.45,44.15 105.08,44.15 | 105.08,44.15 v100.08,44.15 | 105.08,44.15 v105.08,36.27 | v98.95,19.27 v95.2,19.27 | 109.45,43.15 v110.45,42.15
  pour Top: 0.6,111.33 19.68,111.33 19.68,109.55 70.04,109.55 70.04,111.61 92.6,111.61 92.6,67.57 170.54,67.57 170.54,0.01 91.82,0.01 91.82,10.23 73.68,10.23 73.68,0.15 0,0.15 0,47.35 6.48,47.35 6.48,66.87 0.6,66.87
  pour Bottom: 0.6,111.35 19.68,111.35 19.68,109.53 70.06,109.53 70.06,111.59 92.6,111.59 92.6,67.57 170.54,67.57 170.54,0.01 91.8,0.01 91.8,10.23 73.68,10.23 73.68,0.15 0,0.15 0,47.35 6.48,47.35 6.48,66.89 0.6,66.89
GPIO8
  Top 0.15: R1.2 19.83,44.4 19.83,48.27 19.45,48.27 U2.10
I2C_PW  (via drill 0.3)
  Top 0.15: 150.58,15.4 151.21,15.4 151.58,15.78 151.83,15.78 SENSOR2.2 | 150.58,15.4 149.96,15.4 | 149.96,15.4 149.33,15.4 149.08,15.15 SENSOR2.6 | 150.58,15.4 149.58,16.4 149.33,16.4 149.08,16.65 SENSOR2.8 | R1-PINH.2 152.83,9.28 151.71,9.28 R2-PINH.2 151.58,9.28 151.46,9.28 C1.1 150.21,8.15 149.08,8.15 C2.1 148.96,8.15 v148.33,8.78 | v77.83,46.02 65.08,58.77 28.08,58.77 22.08,64.78 21.95,64.78 21.95,65.78 U2.17 | v149.96,14.9 149.96,15.4
  Bottom 0.15: v77.83,46.02 94.7,46.02 131.96,8.78 143.83,8.78 | v148.33,8.78 143.83,8.78 | 143.83,8.78 v149.96,14.9
INT_RTC  (via drill 0.3)
  Top 0.15: v93.45,50.52 94.08,51.15 R1_PINH1.1 | v84.45,46.52 84.45,45.15 U3.3 | v19.33,47.15 16.83,47.15 16.83,48.27 U2.8 | v53.58,47.15 54.2,46.52 v57.45,46.52 | v100.45,55.77 104.2,55.77 104.2,57.9 TP15.TP
  Bottom 0.15: v53.58,47.15 v19.33,47.15 | v57.45,46.52 v84.45,46.52 88.45,50.52 v93.45,50.52 98.7,55.77 v100.45,55.77
IO/BOOT  (via drill 0.3)
  Top 0.15: R_BOOT.1 52.7,107.28 52.7,107.9 52.2,107.9 51.45,108.65 51.33,108.65 BOOT_BUTTON.3 51.2,108.78 47.83,108.78 BOOT_BUTTON.4 47.7,108.78 47.33,109.15 45.33,109.15 45.33,107.9 45.95,107.28 C6.1 45.95,107.15 v45.33,106.53 | v24.45,67.15 24.45,65.9 U2.15
  Bottom 0.15: v24.45,67.15 24.45,85.65 v45.33,106.53
IO/CHANGE  (via drill 0.3)
  Top 0.15: 59.58,107.9 60.45,107.9 61.2,107.15 C10.1 | 59.58,107.9 59.2,108.28 59.2,109.03 62.45,109.03 62.7,108.78 CHANGE_BUTTON.4 62.83,108.78 66.2,108.78 CHANGE_BUTTON.3 67.06,107.96 67.07,107.96 67.19,107.84 67.19,107.7 R_CHANGE.1 | v57.83,105.9 20.33,68.4 14.33,68.4 14.33,65.9 U2.23 | 59.58,107.9 v59.58,107.65
  Bottom 0.15: v59.58,107.65 v57.83,105.9
MISO  (via drill 0.3)
  Top 0.15: 5.08,93.15 5.46,93.15 5.83,92.78 J4.P7 | 5.08,93.15 4.21,94.03 4.21,98.03 TP6.TP | v109.2,4.65 109.83,4.03 R8.1 | v109.08,8.65 109.83,9.4 D12.2 | v33.2,53.9 32.95,54.15 32.45,54.15 U1.2 32.33,54.27 31.7,54.9 19.83,54.9 9.21,65.53 9.21,65.78 U2.27 9.21,65.9 v9.21,70.03 | v4.71,92.78 5.08,93.15
  Bottom 0.15: v109.2,4.65 109.2,8.53 v109.08,8.65 94.45,8.65 90.58,12.53 64.95,12.53 54.08,23.4 54.08,47.27 47.45,53.9 v33.2,53.9 | v4.71,92.78 4.71,88.4 9.21,83.9 v9.21,70.03
MOSI  (via drill 0.3)
  Top 0.15: 88.45,14.9 85.83,14.9 85.7,14.78 82.2,14.78 82.2,15.4 82.33,15.53 82.33,16.9 J1.14 | 88.45,14.9 92.33,11.03 101.7,11.03 109.33,3.4 112.83,3.4 113.33,3.9 R7.1 113.33,4.03 v112.7,4.65 | v112.7,8.65 113.45,9.4 D11.2 | v89.08,33.02 89.33,33.02 90.2,33.9 TP7.TP | 88.45,14.9 v88.83,15.28 | v30.83,50.65 39.2,50.65 40.08,51.52 U1.5 40.2,51.52 45.7,46.02 v58.08,46.02 | v27.33,50.65 17.58,50.65 16.08,49.15 | 16.08,49.15 15.58,48.65 15.58,48.4 U2.7 | v4.96,87.53 5.08,87.53 5.83,88.28 J4.P3 | v10.33,54.52 10.33,53.65 11.58,53.65 16.08,49.15
  Bottom 0.15: v112.7,4.65 v112.7,8.65 | v88.83,15.28 88.83,17.65 89.08,17.9 v89.08,33.02 71.08,33.02 v58.08,46.02 | v27.33,50.65 v30.83,50.65 | v4.96,87.53 8.71,83.78 8.71,69.9 11.46,67.15 11.46,55.65 v10.33,54.52
N$2  (via drill 0.3)
  Top 0.15: v160.58,55.65 155.83,55.65 147.58,47.4 R2-USB.1 | v163.58,55.65 163.21,56.02 162.21,56.02 J2.B5
  Bottom 0.15: v163.58,55.65 v160.58,55.65
N$4  (via drill 0.3)
  Top 0.15: C1_BAT1.1 109.95,41.4 109.95,43.4 110.08,43.4 D2.1 110.2,43.4 110.33,43.27 v111.58,43.27 | 113.95,45.52 113.95,45.65 113.45,45.65 113.33,45.77 IC4.1 | 113.95,45.52 113.95,44.4 113.83,44.27 113.7,44.27 113.33,43.9 IC4.3 | v128.46,47.4 Q1.2 | 113.95,45.52 v114.08,45.52
  Bottom 0.15: v128.46,47.4 115.95,47.4 v114.08,45.52 111.83,43.27 v111.58,43.27
N$5
  Top 0.15: 100.2,31.9 100.2,29.15 99.58,28.52 C4.1 | 100.2,31.9 93.45,31.9 92.83,31.27 D4.1 | 100.2,31.9 105.58,31.9 105.58,36.4 105.2,36.77 87.7,36.77 85.95,38.52 D3.2
N$6  (via drill 0.3)
  Top 0.15: v119.58,48.15 120.45,47.27 R2_BAT.1 | v116.83,55.52 115.95,56.4 MCP73831.5
  Bottom 0.15: v119.58,48.15 119.58,52.77 v116.83,55.52
N$7
  Top 0.15: CHG_LED.C 114.95,52.9 114.95,51.65 R1_BAT.2
N$8  (via drill 0.3)
  Top 0.15: v114.2,52.27 113.58,51.65 R1_BAT.1 | v116.83,54.9 118.33,56.4 MCP73831.1
  Bottom 0.15: v116.83,54.9 v114.2,52.27
N$9  (via drill 0.3)
  Top 0.15: v147.71,49.4 138.71,49.4 138.71,46.52 R2-USB1.2 | v163.21,52.65 162.83,53.02 J2.A5
  Bottom 0.15: v147.71,49.4 159.96,49.4 v163.21,52.65
N$11  (via drill 0.3)
  Top 0.15: v76.83,17.52 77.33,17.02 J1.24 | v76.83,20.02 76.33,20.52 75.58,20.52 EPD_C12.2
  Bottom 0.15: v76.83,20.02 v76.83,17.52
N$12  (via drill 0.3)
  Top 0.15: v78.58,17.9 78.45,17.9 78.45,17.02 J1.22 | v80.33,20.15 79.83,20.65 79.58,20.65 EPD_C10.2
  Bottom 0.15: v78.58,17.9 78.58,18.27 80.33,20.02 v80.33,20.15
N$13  (via drill 0.3)
  Top 0.15: v79.45,17.9 79.45,17.02 J1.20 | v80.33,23.15 v80.33,21.9 | v81.95,21.52 82.33,21.15 83.08,21.15 83.58,20.65 EPD_C8.2
  Bottom 0.15: v79.45,17.9 79.45,18.65 80.83,20.02 80.83,21.4 v80.33,21.9 | v81.95,21.52 v80.33,23.15
N$14  (via drill 0.3)
  Top 0.15: v80.33,24.65 74.83,24.65 74.83,18.77 75.2,18.4 79.95,18.4 79.95,17.02 J1.19 | v84.7,21.4 85.45,20.65 EPD_C7.2
  Bottom 0.15: v80.33,24.65 81.45,24.65 v84.7,21.4
N$15  (via drill 0.3)
  Top 0.15: v78.58,18.9 78.7,18.77 80.33,18.77 80.33,17.02 J1.18 | v78.83,20.02 78.83,24.15 v79.83,24.15 | v80.83,25.77 84.45,22.15 85.95,22.15 87.45,20.65 EPD_C6.2
  Bottom 0.15: v78.58,18.9 78.58,19.77 v78.83,20.02 | v79.83,24.15 79.83,24.77 v80.83,25.77
N$16  (via drill 0.3)
  Top 0.15: v86.45,16.15 86.83,16.15 86.83,16.9 J1.5 | v58.2,19.9 58.2,21.65 57.58,21.65 EPD_C2.2
  Bottom 0.15: v86.45,16.15 83.2,12.9 65.2,12.9 v58.2,19.9
N$17  (via drill 0.3)
  Top 0.15: v89.45,17.65 87.45,17.65 87.45,17.02 J1.4 | v97.45,25.65 103.95,25.65 EPD_C1.2
  Bottom 0.15: v97.45,25.65 v89.45,17.65
N$18  (via drill 0.3)
  Top 0.15: v49.83,101.65 50.45,101.03 C_DELAY.1 | v49.83,103.53 49.08,102.78 48.95,102.78 IC1.5
  Bottom 0.15: v49.83,103.53 v49.83,101.65
N$19
  Top 0.15: R_CAPACITOR.1 90.33,57.77 90.33,59.9 91.83,59.9 D7.1
PREVGH  (via drill 0.3)
  Top 0.15: v79.83,16.15 78.95,16.15 78.95,16.9 J1.21 | v82.83,20.65 81.7,20.65 EPD_C9.2 | v87.83,28.15 90.33,28.15 92.58,25.9 D5.1
  Bottom 0.15: v79.83,16.15 80.7,16.15 82.83,18.27 83.83,18.27 | 83.83,18.27 83.95,18.27 84.7,17.52 84.95,17.52 85.33,17.9 85.33,18.15 v82.83,20.65 | v87.83,28.15 87.83,19.02 84.45,15.65 84.2,15.65 83.83,16.02 83.83,18.27
PREVGL  (via drill 0.3)
  Top 0.15: v77.83,21.4 77.83,20.77 77.58,20.77 EPD_C11.2 | J1.23 77.83,17.02 v77.83,17.9 77.7,18.02 74.45,18.02 74.45,24.77 v76.83,27.15 | v84.58,28.65 93.7,28.65 96.2,31.15 D4.2
  Bottom 0.15: v77.83,21.4 v77.83,17.9 | v84.58,28.65 78.33,28.65 v76.83,27.15
RESE  (via drill 0.3)
  Top 0.15: v87.7,16.15 87.83,16.15 87.83,16.9 J1.3 | v85.95,14.4 85.45,13.9 80.58,13.9 v80.08,14.4 | 63.33,15.4 62.58,16.15 Q3.2 | 63.33,15.4 v64.33,14.4 | 63.33,15.4 61.2,15.4 57.83,12.03 R3.1
  Bottom 0.15: v85.95,14.4 v87.7,16.15 | v64.33,14.4 v80.08,14.4
RESE'
  Top 0.15: R3.2 59.08,8.53 59.45,8.53 SJ1.2 59.58,8.53 61.58,8.53 62.2,9.15 R2.2
RESET  (via drill 0.3)
  Top 0.15: 26.58,108.53 26.45,108.65 26.33,108.65 REST_BUTTON.3 | 26.58,108.53 27.83,107.28 R_RESET.1 | 26.58,108.53 27.2,109.15 39.7,109.15 46.08,102.78 IC1.1 | 26.58,108.53 REST_BUTTON.3 | v10.58,53.15 10.58,48.4 U2.3 | v19.7,105.65 21.2,107.15 C5.1 21.2,107.28 20.45,108.03 20.45,109.03 22.45,109.03 22.7,108.78 REST_BUTTON.4 22.83,108.78 26.2,108.78 REST_BUTTON.3
  Bottom 0.15: v10.58,53.15 11.46,54.02 11.46,55.15 19.7,63.4 v19.7,105.65
RTC_RST  (via drill 0.3)
  Top 0.15: v77.83,53.77 72.45,59.15 46.08,59.15 41.08,64.15 23.2,64.15 23.2,65.78 U2.16 | v84.45,47.15 85.7,45.9 85.7,45.15 U3.4
  Bottom 0.15: v84.45,47.15 v77.83,53.77
RX  (via drill 0.3)
  Top 0.15: v13.08,75.4 13.08,65.9 U2.24 | v19.2,86.28 21.08,88.15 TP2.TP
  Bottom 0.15: v13.08,75.4 13.08,80.15 v19.2,86.28
SCK  (via drill 0.3)
  Top 0.15: v20.2,98.9 8.21,98.9 8.21,92.53 6.71,91.03 6.46,91.03 5.96,90.53 J4.P5 | v15.08,49.52 14.33,48.77 14.33,48.4 U2.6 | v116.58,4.65 116.7,4.65 117.33,4.03 R6.1 | v116.58,8.78 117.33,9.53 D10.2 | v82.83,16.15 82.83,16.9 J1.13 | 61.58,43.15 61.58,43.77 61.45,43.77 52.33,52.9 40.2,52.9 U1.6 40.08,52.9 v39.45,52.27 | 61.58,43.15 v61.58,29.65 | v63.58,44.77 75.95,44.77 TP8.TP 76.08,44.77 v77.58,44.77 | 61.58,43.15 v61.95,43.15
  Bottom 0.15: v20.2,98.9 20.2,69.53 20.7,69.03 20.7,55.15 18.58,53.02 | v15.08,49.52 18.58,53.02 | v116.58,4.65 v116.58,8.78 114.95,8.78 78.95,44.77 v77.58,44.77 | v82.83,16.15 81.2,16.15 80.33,15.28 75.95,15.28 v61.58,29.65 | v61.95,43.15 v63.58,44.77 | 18.58,53.02 22.83,48.77 35.95,48.77 v39.45,52.27
SCL  (via drill 0.3)
  Top 0.15: 153.58,14.15 153.58,8.78 153.46,8.65 152.21,8.65 151.71,8.15 R2-PINH.1 | 153.58,14.15 151.96,14.15 SENSOR2.4 | 153.58,14.15 158.71,19.27 | 158.71,19.27 159.83,20.4 164.71,20.4 165.08,20.77 J3.4 | v102.83,57.27 102.08,57.27 U4.7 | v88.08,57.27 86.95,56.15 84.33,56.15 83.83,55.65 82.83,55.65 82.08,54.9 82.08,54.52 U3.16 | U2.20 18.08,58.02 48.83,58.02 v52.58,54.27 | v147.08,30.9 158.71,19.27
  Bottom 0.15: v52.58,54.27 81.33,54.27 83.08,52.52 83.33,52.52 v88.08,57.27 v102.83,57.27 104.45,58.9 119.58,58.9 147.08,31.4 v147.08,30.9
SDA  (via drill 0.3)
  Top 0.15: SENSOR2.3 151.83,15.03 151.58,15.03 150.33,13.78 v147.83,13.78 147.83,8.15 148.58,7.4 152.33,7.4 152.83,7.9 R1-PINH.1 152.96,8.03 153.08,8.15 153.96,8.15 153.96,8.9 164.46,19.4 164.71,19.4 165.08,19.77 J3.3 | v100.7,58.15 101.7,58.15 101.95,57.9 U4.8 | v83.2,53.02 83.2,54.4 U3.15 | v21.2,64.15 19.45,64.15 19.45,65.78 U2.19
  Bottom 0.15: v83.2,53.02 84.83,54.65 | 84.83,54.65 88.33,58.15 v100.7,58.15 101.83,59.27 119.7,59.27 147.83,31.15 v147.83,13.78 | v21.2,64.15 37.58,64.15 37.83,64.4 45.45,64.4 55.2,54.65 84.83,54.65
SRC
  Top 0.15: 98.33,28.52 96.2,26.4 96.2,25.9 D5.2 | 98.33,28.52 99.45,29.65 C4.2 | 81.83,32.77 81.83,30.4 80.83,29.4 80.7,29.4 79.45,28.15 71.7,28.15 61.95,18.4 Q3.3 | 98.33,28.52 99.08,27.77 101.95,27.77 105.95,31.77 105.95,39.27 81.7,39.27 81.45,39.02 81.45,32.77 81.83,32.77 | 81.83,32.77 L1.1
SS_SD  (via drill 0.3)
  Top 0.15: v128.58,4.78 128.46,4.78 127.83,4.15 R10.1 | v128.58,9.03 127.83,9.78 D8.2 | v11.83,52.77 11.83,48.4 U2.4 | v7.83,81.28 v20.2,68.9 | v6.71,82.4 6.71,85.53 6.83,85.65 6.83,87.15 6.33,87.15 J4.P2
  Bottom 0.15: v128.58,9.03 v128.58,4.78 123.33,4.78 122.08,3.52 99.08,3.52 90.45,12.15 51.83,12.15 11.83,52.15 v11.83,52.77 11.83,55.02 20.2,63.4 v20.2,68.9 | v6.71,82.4 v7.83,81.28
TX  (via drill 0.3)
  Top 0.15: v10.96,67.03 11.71,67.03 11.71,65.9 U2.25 | v5.58,68.4 3.46,68.4 TP1.TP
  Bottom 0.15: v10.96,67.03 6.96,67.03 v5.58,68.4
USB_D+  (via drill 0.3)
  Top 0.15: v141.08,47.77 141.58,47.77 142.08,47.27 D1.1 | v49.08,63.02 48.08,62.02 v43.83,62.02 | v25.33,49.27 24.45,48.4 U2.14
  Bottom 0.15: v141.08,47.77 125.83,63.02 v49.08,63.02 | v43.83,62.02 38.08,62.02 v25.33,49.27
USB_D-  (via drill 0.3)
  Top 0.15: v141.08,45.27 142.08,45.27 D1.3 | v43.33,62.52 v47.95,62.52 | v24.08,49.52 23.2,48.65 23.2,48.4 U2.13
  Bottom 0.15: v141.08,45.27 134.21,45.27 116.95,62.52 v47.95,62.52 | v43.33,62.52 37.08,62.52 v24.08,49.52
VBAT
  Top 0.3: TP3.TP 130.82,44.15 130.82,49.57 128.7,49.57 Q1.3 122.76,55.39 122.76,57.15 C2_BAT.1 119.96,57.15 119.16,57.95 118.84,57.95 MCP73831.3 117.59,59.2 103.77,59.2 103.24,58.67 99.1,58.67 98.98,58.55 98.98,57.31 98.99,57.3 U4.2 U4.3
VBUS
  Top 0.3: R1_PWRUSB.2 108.94,45.58 D2.2 122.66,33.03 PFMF.050.1.2 144.2,35.68 C5_USB.1 144.2,41.11 C4_USB.1 145.16,44.69 145.33,44.69 145.49,44.85 145.49,45.68 145.33,45.85 144.98,45.85 D1.5 145.61,46.22 145.92,46.53 145.92,48.33 145.84,48.41 140.88,48.41 139.64,47.17 139.64,38.69 139.2,38.25 133.7,38.25 127.69,44.26 Q1.1 123.6,47.41 117.22,53.79 114.36,53.79 CHG_LED.A 112.48,53.89 108.34,53.89 108.25,53.8 C1_BAT.1 113.8,58.35 MCP73831.4 107.78,58.35 103.36,53.93 101.51,53.93 98.55,56.88 98.55,57.7 97.08,59.17 102.77,64.86 TP14.TP
VRTC
  Top 0.3: U3.14 85.22,55.1 85.22,55.5 85.43,55.71 89.52,55.71 R_CAPACITOR.2 92.86,56.47 92.86,46.15 94.16,44.85 94.97,44.85 C8.1 98.81,44.93 C10_SUPERCAP.1
VUSB
  Top 0.3: PFMF.050.1.1 161.36,48.34 161.36,51.49 161.53,51.66 161.84,51.66 J2.B9 | J2.A4 J2.B9 | J2.B9 162.14,52.1 161.52,52.1 161.35,52.27 161.35,52.79 161.35,52.89 161.16,53.08 161.16,56.53 J2.B4 J2.A9